# EAGLE board INKTIME_PCB (EAGLE 9.7.0)
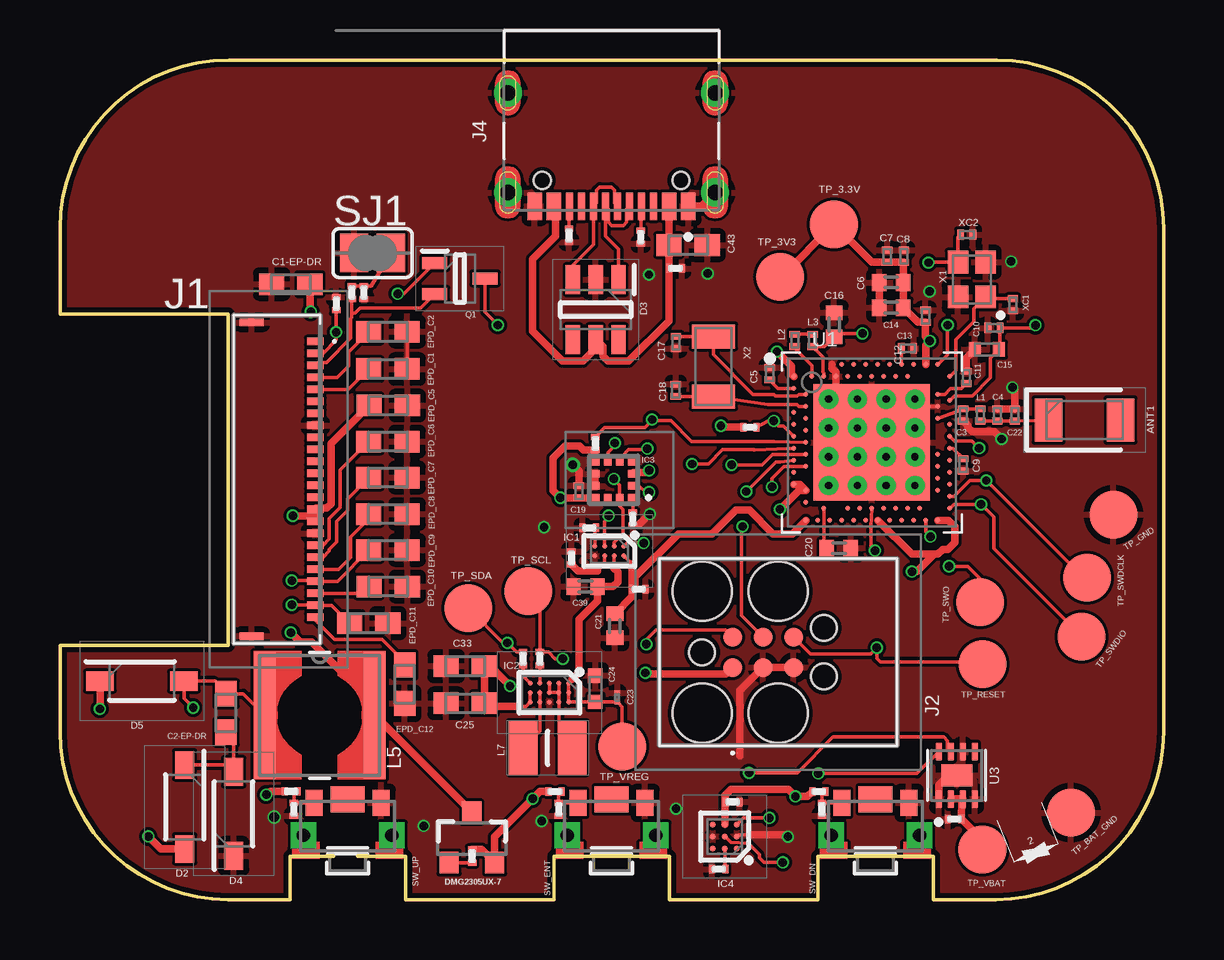
[diagram p0: board, top side]
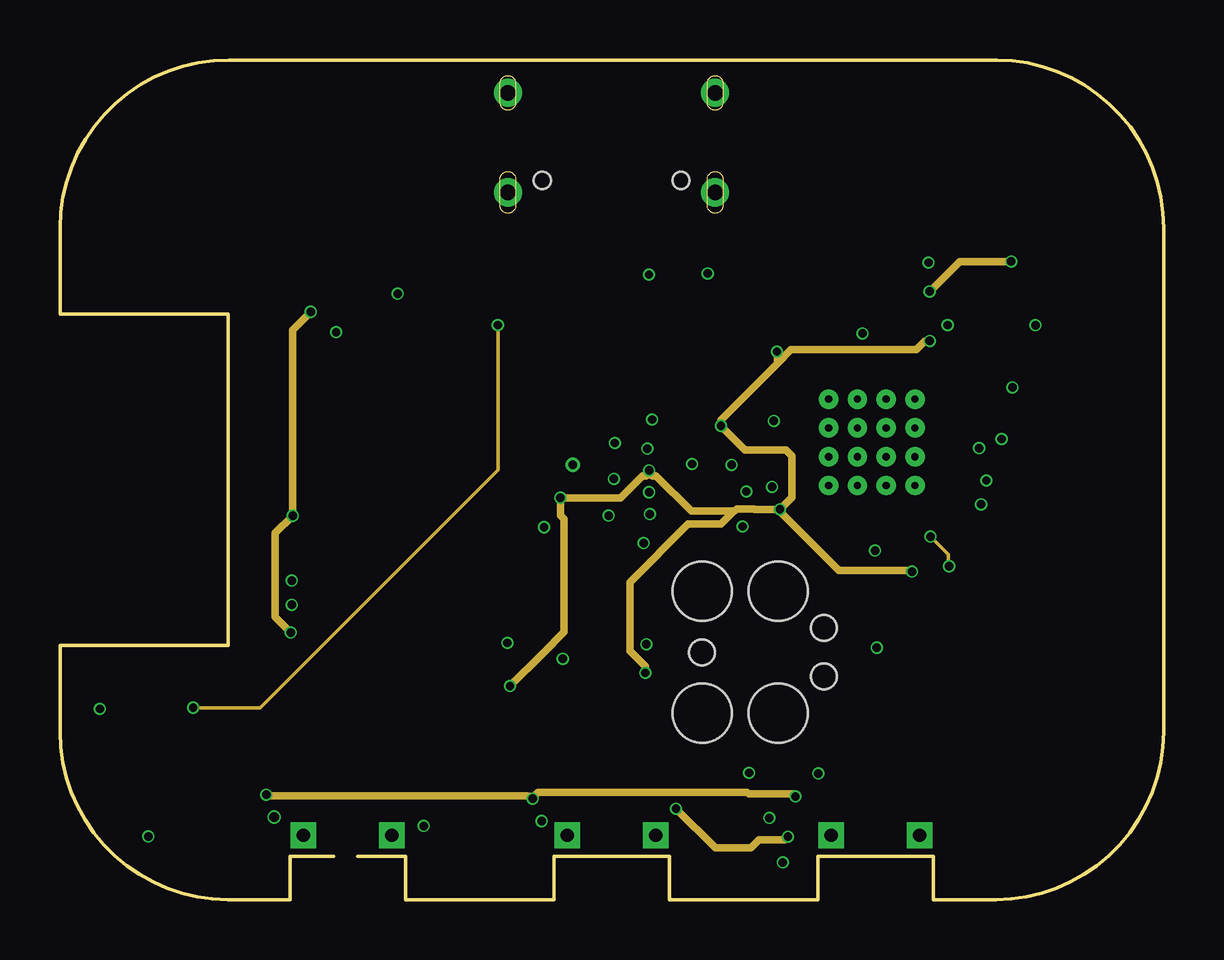
[diagram p1: board, inner layer Route2]
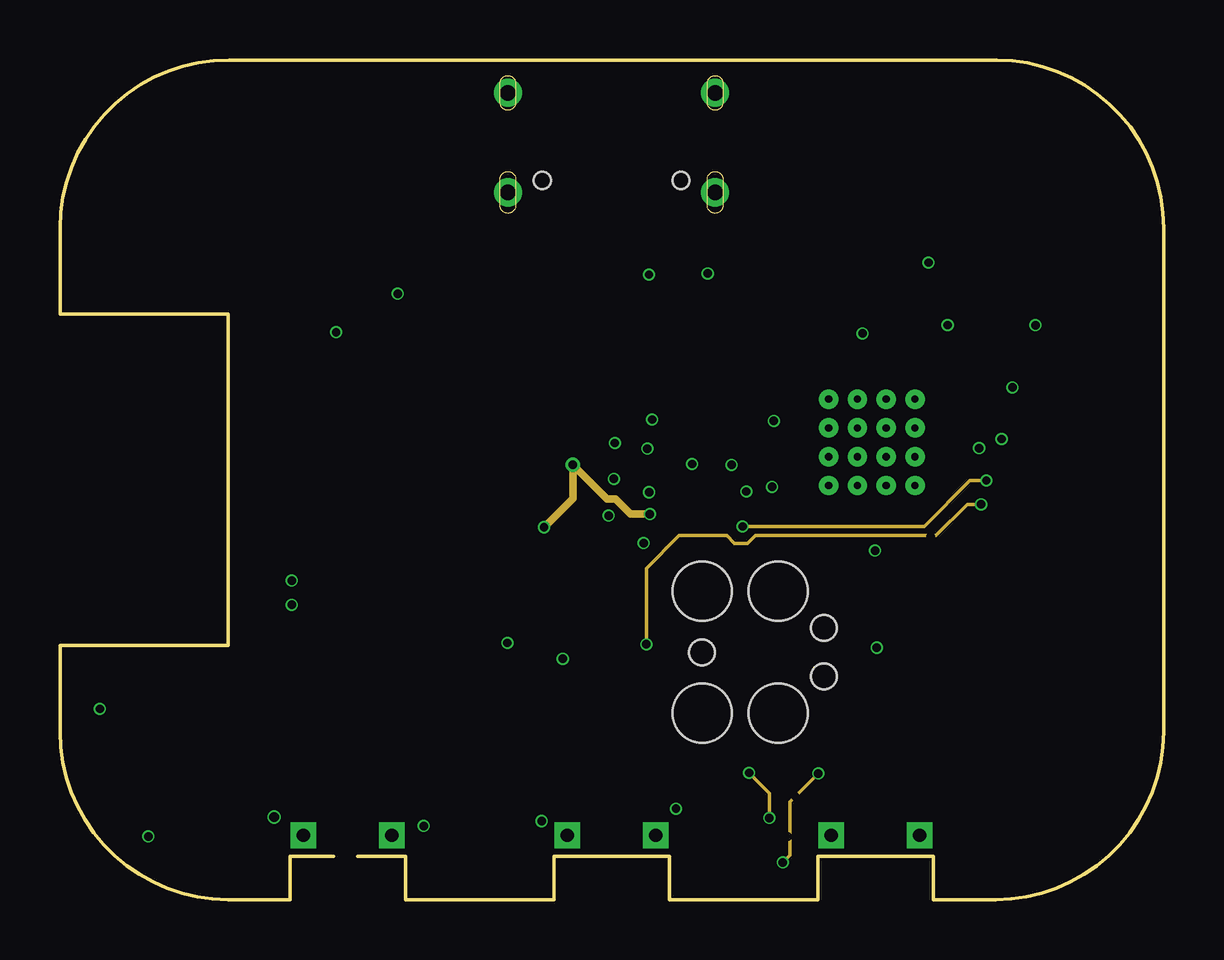
[diagram p2: board, inner layer Route15]
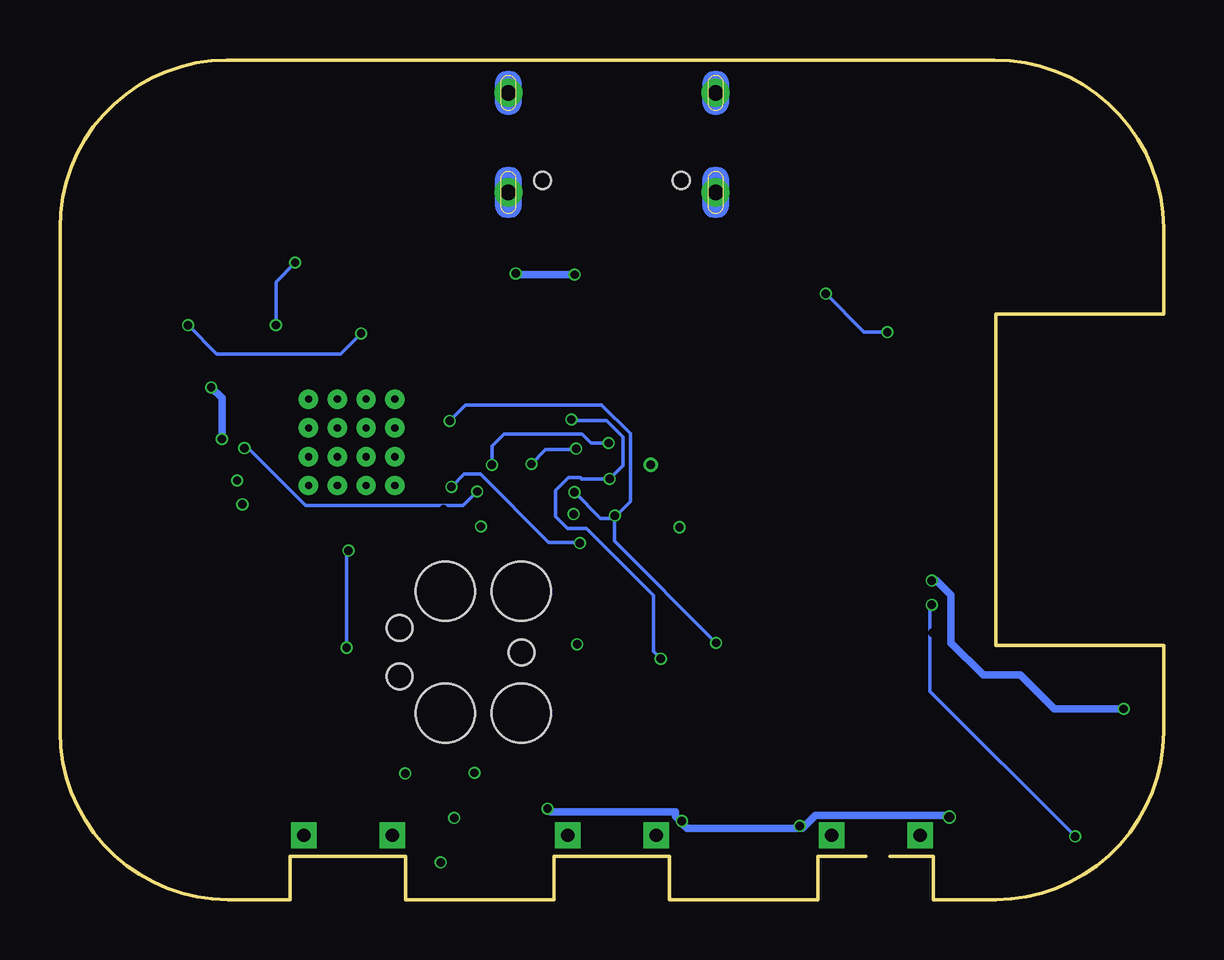
[diagram p3: board, bottom side, seen from below]

Size 46 x 35 mm. Coordinates in mm from the lower left corner, seen from the top.
Outline: 39,0 36.4,0 36.4,1.8 31.6,1.8 31.6,0 25.4,0 25.4,1.8 20.6,1.8 20.6,0 14.4,0 14.4,1.8 9.6,1.8 9.6,0 7,0 arc-90 0,7 0,10.6 7,10.6 7,24.4 0,24.4 0,28 arc-90 7.05,35 39.05,35 arc-90 46,28 46,7 arc-90 39,0
Copper layers (1*16): Top 0.035mm / dielectric 1.6mm / Bottom 0.035mm
Design rules "jlcpcb-2layers": minimum track width 5mil, minimum drill 0.3mm, track to track 5mil, track to pad 5mil, pad to pad 5mil, via to via 5mil, smd to smd 5mil, copper to edge 0.2mm, drill to drill 6mil, minimum pad ring 10mil, minimum via ring 3mil, stop-mask expansion 4mil, vias tented up to drill 0mil, thermal gap 10mil

## Footprints (pad centres in the part's own frame; a part is rotated, then mirrored left to right if it is on the bottom)
2450AT18B100E_ANTC3216X140N = smd 1.15 x 1.8: 1 -1.5,0; 2 1.5,0
NORDIC_NRF_3_RESC0603_N = smd 1.05 x 0.9: 1 -0.8,0; 2 0.8,0
NORDIC_NRF_3_RESC0201_L = smd 0.28 x 0.43: 1 -0.255,0; 2 0.255,0
PERFECT_0402_0402 = smd 0.6 x 0.7: 1 -0.5,0; 2 0.5,0
NORDIC_NRF_3_RESC0402_L = smd 0.5 x 0.6: 1 -0.5,0; 2 0.5,0
GRM011R60J152KE01L_2_CAPC0201X13N = smd 0.22 x 0.23: 1 -0.185,0; 2 0.185,0
NORDIC_NRF_3_RESC0402_N = smd 0.6 x 0.6: 1 -0.55,0; 2 0.55,0
GRM011R60J152KE01L_1_0201 = smd 0.35 x 0.25: 1 0,0.275; 2 0,-0.275
ESP32_C6_LIBRARY_5_SOD3716X135N = smd 1.15 x 0.8: 1 -1.75,0; 2 1.75,0
ESP32_C6_LIBRARY_3_SOT95P280X145-6N = smd 1.2 x 0.6: 1 -1.25,0.95; 2 -1.25,0; 3 -1.25,-0.95; 4 1.25,-0.95; 5 1.25,0; 6 1.25,0.95
ESP32_C6_LIBRARY_4_ESP32_C6_LIBRARY_4_ESP32_C6_LIBRARY_4_ESP32_C6_LIBRARY_4_ESP32_WROVER_SPARKFUN-DISCRETESEMI_SOT23-3 = smd 0.8 x 0.9: 1 -0.95,-1; 2 0.95,-1; 3 0,1.1
BQ25180YBGR_BGA8C40P2X4_100X155X50 = smd 0.2 x 0.2: A1 -0.2,0.6; A2 0.2,0.6; B1 -0.2,0.2; B2 0.2,0.2; C1 -0.2,-0.2; C2 0.2,-0.2; D1 -0.2,-0.6; D2 0.2,-0.6
RT6160AWSC_BGA15C40P3X5_140X230X60 = smd 0.216 x 0.216: A1 -0.4,0.8; A2 0,0.8; A3 0.4,0.8; B1 -0.4,0.4; B2 0,0.4; B3 0.4,0.4; C1 -0.4,0; C2 0,0; C3 0.4,0; D1 -0.4,-0.4; D2 0,-0.4; D3 0.4,-0.4; E1 -0.4,-0.8; E2 0,-0.8; E3 0.4,-0.8
BMA423_BMA423 = smd 0.3 x 0.35: 1 -0.75,-0.775; 2 -0.25,-0.775; 3 0.25,-0.775; 4 0.75,-0.775; 7 0.75,0.775; 8 0.25,0.775; 9 -0.25,0.775; 10 -0.75,0.775 | smd 0.35 x 0.3: 5 0.775,-0.25; 6 0.775,0.25; 11 -0.775,0.25; 12 -0.775,-0.25
DRV2605YZFR_BGA9C50P3X3_144X144X62 = smd 0.25 x 0.25: A1 -0.5,0.5; A2 0,0.5; A3 0.5,0.5; B1 -0.5,0; B2 0,0; B3 0.5,0; C1 -0.5,-0.5; C2 0,-0.5; C3 0.5,-0.5
503480-2400_5034802400 = smd 0.3 x 0.7: 1 -5.75,1.525; 2 -5.25,1.525; 3 -4.75,1.525; 4 -4.25,1.525; 5 -3.75,1.525; 6 -3.25,1.525; 7 -2.75,1.525; 8 -2.25,1.525; 9 -1.75,1.525; 10 -1.25,1.525; 11 -0.75,1.525; 12 -0.25,1.525; 13 0.25,1.525; 14 0.75,1.525; 15 1.25,1.525; 16 1.75,1.525; 17 2.25,1.525; 18 2.75,1.525; 19 3.25,1.525; 20 3.75,1.525; 21 4.25,1.525; 22 4.75,1.525; 23 5.25,1.525; 24 5.75,1.525 | smd 0.3 x 1: MP1 -6.54,-1.125; MP2 6.54,-1.125
TC2030-IDC_TC2030IDC = smd 0.783 x 0.783: 1 -0.953,-0.635; 2 -0.953,0.635; 3 0.317,-0.635; 4 0.317,0.635; 5 1.588,-0.635; 6 1.588,0.635 | hole 2.451: -2.223,-2.54; -2.223,2.54; 0.952,-2.54; 0.952,2.54 | hole 1.067: -2.223,0; 2.857,-1.016; 2.857,1.016
KH-TYPE-C-16P_KINGHELM_KH-TYPE-C-16P = smd 0.6 x 1.15: A1_B12 -3.2,4.725; A4_B9 -2.4,4.725; A9_B4 2.4,4.725; A12_B1 3.2,4.725 | smd 0.3 x 1.15: A5 -1.25,4.725; A6 -0.25,4.725; A7 0.25,4.725; A8 1.25,4.725; B5 1.75,4.725; B6 0.75,4.725; B7 -0.75,4.725; B8 -1.75,4.725 | drill 0.65 pad 1.05: SH1 -4.32,0; SH2 4.32,0; SH3 -4.32,4.15; SH4 4.32,4.15 | hole 0.7: -2.89,3.65; 2.89,3.65
NORDIC_NRF_2_RESC0201_L = smd 0.28 x 0.43: 1 -0.255,0; 2 0.255,0
ESP32_C6_LIBRARY_2_IND_4828-WE-TPC_WRE = smd 0.9 x 5.3: 1 -2.286,0; 2 2.286,0
MLP2016SR47MT0S1_INDC2016X100N = smd 1.2 x 2.2: 1 -1.028,0; 2 1.028,0
ESP32_C6_LIBRARY_6_SOT65P210X110-3N = smd 1.05 x 0.5: 1 -1.05,0.65; 2 -1.05,-0.65; 3 1.05,0
CPF0201D7K68C1_0201 = smd 0.35 x 0.25: 1 0,0.275; 2 0,-0.275
ESP32_C6_LIBRARY_7_JUMPER_SJ = smd 1.168 x 1.6: 1 -0.762,0; 2 0.762,0
2025-10-22_07-23-44_LIBRARY_SW_EVP-AKE31A_PAN = smd 0.711 x 1.092: 1 -1.4,-0.972; 2 1.4,-0.972 | drill 0.559 pad 0.914 square: 3 -1.848,0.381; 4 1.848,0.381 | smd 1.397 x 1.092: 5 0,-1.124
HECTOR_WATCH_1_TP20R = smd 2 x 2: TP 0,0
NORDIC_NRF_4_AQFN50P700X700X85_HS-74N = smd 4.85 x 4.85: P$74 0,0 | drill 0.3 pad 0.6: P$75 -1.8,1.8; P$76 -0.6,1.8; P$77 0.6,1.8; P$78 1.8,1.8; P$79 -1.8,0.6; P$80 -0.6,0.6; P$81 0.6,0.6; P$82 1.8,0.6; P$83 -1.8,-0.6; P$84 -0.6,-0.6; P$85 0.6,-0.6; P$86 1.8,-0.6; P$87 -1.8,-1.8; P$88 -0.6,-1.8; P$89 0.6,-1.8; P$90 1.8,-1.8 | smd 0.2 x 0.2: P$A8 -1.25,3.25; P$A10 -0.75,3.25; P$A12 -0.25,3.25; P$A14 0.25,3.25; P$A16 0.75,3.25; P$A18 1.25,3.25; P$A20 1.75,3.25; P$A22 2.25,3.25; P$A23 2.75,3.25; P$AA24 3.25,-2.25; P$AB2 -2.75,-2.5; P$AC5 -2,-2.75; P$AC9 -1,-2.75; P$AC11 -0.5,-2.75; P$AC13 0,-2.75; P$AC15 0.5,-2.75; P$AC17 1,-2.75; P$AC19 1.5,-2.75; P$AC21 2,-2.75; P$AC24 3.25,-2.75; P$AD2 -2.75,-3.25; P$AD4 -2.25,-3.25; P$AD6 -1.75,-3.25; P$AD8 -1.25,-3.25; P$AD10 -0.75,-3.25; P$AD12 -0.25,-3.25; P$AD14 0.25,-3.25; P$AD16 0.75,-3.25; P$AD18 1.25,-3.25; P$AD20 1.75,-3.25; P$AD22 2.25,-3.25; P$AD23 2.75,-3.25; P$B1 -3.25,2.75; P$B3 -2.5,2.75; P$B5 -2,2.75; P$B7 -1.5,2.75; P$B9 -1,2.75; P$B11 -0.5,2.75; P$B13 0,2.75; P$B15 0.5,2.75; P$B17 1,2.75; P$B19 1.5,2.75; P$B24 3.25,2.75; P$C1 -3.25,2.25; P$D2 -2.75,2; P$D23 2.75,2; P$E24 3.25,1.75; P$F2 -2.75,1.5; P$F23 2.75,1.5; P$G1 -3.25,1.25; P$H2 -2.75,1; P$H23 2.75,1; P$J1 -3.25,0.75; P$J24 3.25,0.75; P$K2 -2.75,0.5; P$L1 -3.25,0.25; P$L24 3.25,0.25; P$M2 -2.75,0; P$N1 -3.25,-0.25; P$N24 3.25,-0.25; P$P2 -2.75,-0.5; P$P23 2.75,-0.5; P$R1 -3.25,-0.75; P$R24 3.25,-0.75; P$T2 -2.75,-1; P$T23 2.75,-1; P$U1 -3.25,-1.25; P$U24 3.25,-1.25; P$V23 2.75,-1.5; P$W1 -3.25,-1.75; P$W24 3.25,-1.75; P$Y2 -2.75,-2; P$Y23 2.75,-2
ESP32_C6_LIBRARY_SON50P200X200X80-9N = smd 0.76 x 0.27: 1 -0.985,0.75; 2 -0.985,0.25; 3 -0.985,-0.25; 4 -0.985,-0.75; 5 0.985,-0.75; 6 0.985,-0.25; 7 0.985,0.25; 8 0.985,0.75 | smd 0.9 x 1.3: 9 0,0
NORDIC_NRF_BT-XTAL_2016_N = smd 0.95 x 0.85: 1 -0.725,-0.575; 2 0.725,-0.575; 3 0.725,0.575; 4 -0.725,0.575
NORDIC_NRF_1_XTAL_3215_N = smd 1 x 1.8: 1 -1.25,0; 2 1.25,0

## Placement (x,y rotation side)
ANT1  2450AT18B100E  [2450AT18B100E_ANTC3216X140N]  42.71,19.99 0 top
C1-EP-DR  10uF  [NORDIC_NRF_3_RESC0603_N]  9.62,25.65 0 top
C2-EP-DR  4.7uF/25V  [NORDIC_NRF_3_RESC0603_N]  6.92,7.78 270 top
C3  1pF  [NORDIC_NRF_3_RESC0201_L]  37.65,20.2 270 top
C4  1pF  [NORDIC_NRF_3_RESC0201_L]  39.08,20.2 90 top
C5  100nF  [NORDIC_NRF_3_RESC0201_L]  29.58,21.92 90 top
C6  4.7uF  [PERFECT_0402_0402]  34.65,25.72 180 top
C7  100nF  [NORDIC_NRF_3_RESC0201_L]  34.48,26.82 90 top
C8  100nF  [NORDIC_NRF_3_RESC0201_L]  35.18,26.82 90 top
C9  820pF  [NORDIC_NRF_3_RESC0201_L]  37.65,18.12 270 top
C10  N.C.  [NORDIC_NRF_3_RESC0201_L]  38.93,23.83 180 top
C11  100pF  [NORDIC_NRF_3_RESC0201_L]  37.78,21.77 90 top
C12  100nF  [NORDIC_NRF_3_RESC0201_L]  36.08,24.32 90 top
C13  N.C.  [NORDIC_NRF_3_RESC0201_L]  35.33,22.98 0 top
C14  4.7uF  [PERFECT_0402_0402]  34.65,24.67 180 top
C15  1uF  [NORDIC_NRF_3_RESC0402_L]  38.64,22.93 180 top
C16  47nF  [PERFECT_0402_0402]  32.27,23.96 90 top
C17  12pF  [NORDIC_NRF_3_RESC0201_L]  25.68,23.22 90 top
C18  12pF  [NORDIC_NRF_3_RESC0201_L]  25.67,21.23 270 top
C19  100nF  [NORDIC_NRF_3_RESC0201_L]  21.63,17 90 top
C20  4.7uF  [PERFECT_0402_0402]  32.47,14.65 0 top
C21  4.7uF  [PERFECT_0402_0402]  23.13,11.41 270 top
C22  N.C.  [NORDIC_NRF_3_RESC0201_L]  39.8,20.2 90 top
C23  0.1uF  [GRM011R60J152KE01L_2_CAPC0201X13N]  23.23,8.43 270 top
C24  10uF  [NORDIC_NRF_3_RESC0402_N]  22.32,8.79 270 top
C25  22uF  [NORDIC_NRF_3_RESC0603_N]  16.89,8.18 180 top
C27  0.1uF  [GRM011R60J152KE01L_1_0201]  37.29,3.36 90 top
C29  1uF  [GRM011R60J152KE01L_1_0201]  31.76,3.76 180 top
C30  1uF  [GRM011R60J152KE01L_1_0201]  9.75,3.76 180 top
C31  1uF  [GRM011R60J152KE01L_1_0201]  20.79,3.76 180 top
C32  1uF  [GRM011R60J152KE01L_1_0201]  27.46,1.27 90 top
C33  22uF  [NORDIC_NRF_3_RESC0603_N]  16.89,9.73 180 top
C34  0.1uF  [GRM011R60J152KE01L_1_0201]  28.04,4.07 270 top
C37  1uF  [GRM011R60J152KE01L_1_0201]  21.32,14.24 0 top
C38  1uF  [GRM011R60J152KE01L_1_0201]  24.13,12.93 270 top
C39  10uF  [PERFECT_0402_0402]  21.91,13.04 180 top
C42  1uF  [GRM011R60J152KE01L_1_0201]  25.66,26.31 90 top
C43  4.7uF  [NORDIC_NRF_3_RESC0603_N]  26.18,27.28 0 top
D2  MBR0530  [ESP32_C6_LIBRARY_5_SOD3716X135N]  5.2,3.86 270 top
D3  USBLC6-2SC6Y  [ESP32_C6_LIBRARY_3_SOT95P280X145-6N]  22.33,24.59 270 top
D4  MBR0530  [ESP32_C6_LIBRARY_5_SOD3716X135N]  7.24,3.57 90 top
D5  MBR0530  [ESP32_C6_LIBRARY_5_SOD3716X135N]  3.42,9.11 0 top
DMG2305UX-7  20V/4.2A/52mΩ/1.4W  [ESP32_C6_LIBRARY_4_ESP32_C6_LIBRARY_4_ESP32_C6_LIBRARY_4_ESP32_C6_LIBRARY_4_ESP32_WROVER_SPARKFUN-DISCRETESEMI_SOT23-3]  17.17,2.54 0 top
EPD_C1  1uF/50V  [NORDIC_NRF_3_RESC0603_N]  13.67,22.12 180 top
EPD_C2  1uF/50V  [NORDIC_NRF_3_RESC0603_N]  13.67,23.67 180 top
EPD_C5  0.1uF/50V  [NORDIC_NRF_3_RESC0603_N]  13.68,20.6 180 top
EPD_C6  1uF/50V  [NORDIC_NRF_3_RESC0603_N]  13.67,19.09 180 top
EPD_C7  1uF/50V  [NORDIC_NRF_3_RESC0603_N]  13.67,17.59 180 top
EPD_C8  1uF/50V  [NORDIC_NRF_3_RESC0603_N]  13.67,16.07 180 top
EPD_C9  1uF/50V  [NORDIC_NRF_3_RESC0603_N]  13.67,14.57 180 top
EPD_C10  1uF/50V  [NORDIC_NRF_3_RESC0603_N]  13.68,13.05 180 top
EPD_C11  1uF/50V  [NORDIC_NRF_3_RESC0603_N]  12.87,11.52 180 top
EPD_C12  1uF/50V  [NORDIC_NRF_3_RESC0603_N]  14.37,8.98 90 top
IC1  BQ25180YBGR  [BQ25180YBGR_BGA8C40P2X4_100X155X50]  22.9,14.53 270 top
IC2  RT6160AWSC  [RT6160AWSC_BGA15C40P3X5_140X230X60]  20.4,8.63 270 top
IC3  BMA423  [BMA423_BMA423]  23.08,17.5 90 top
IC4  DRV2605YZFR  [DRV2605YZFR_BGA9C50P3X3_144X144X62]  27.71,2.63 180 top
J1  503480-2400  [503480-2400_5034802400]  9.12,17.52 270 top
J2  TC2030-IDC  [TC2030-IDC_TC2030IDC]  28.99,10.31 0 top
J4  KH-TYPE-C-16P  [KH-TYPE-C-16P_KINGHELM_KH-TYPE-C-16P]  22.99,33.63 180 top
L1  3.9nH  [NORDIC_NRF_2_RESC0201_L]  38.36,20.2 270 top
L2  10uH  [NORDIC_NRF_2_RESC0201_L]  30.63,23.31 90 top
L3  15nH  [NORDIC_NRF_2_RESC0201_L]  31.37,23.31 270 top
L5  68uH  [ESP32_C6_LIBRARY_2_IND_4828-WE-TPC_WRE]  10.83,7.68 0 top
L7  FTC252012SR47MBCA  [MLP2016SR47MT0S1_INDC2016X100N]  20.33,6.33 180 top
Q1  SI1308EDL-T1-GE3  [ESP32_C6_LIBRARY_6_SOT65P210X110-3N]  16.67,25.89 0 top
R1  0  [CPF0201D7K68C1_0201]  23.88,15.86 180 top
R1_EP_DR  0.47  [CPF0201D7K68C1_0201]  12.17,25.3 0 top
R1_USB  5K1  [CPF0201D7K68C1_0201]  24.21,27.61 180 top
R2  0  [CPF0201D7K68C1_0201]  19.3,10.04 0 top
R2_EP_DR  10K  [CPF0201D7K68C1_0201]  11.52,24.84 0 top
R2_USB  5K1  [CPF0201D7K68C1_0201]  21.22,27.69 0 top
R4  0  [CPF0201D7K68C1_0201]  20,10.04 0 top
R5  10K  [CPF0201D7K68C1_0201]  9.64,4.51 270 top
R7  10K  [CPF0201D7K68C1_0201]  31.64,4.5 270 top
R8  10K  [CPF0201D7K68C1_0201]  20.64,4.5 270 top
R9  10K  [CPF0201D7K68C1_0201]  22.06,15.49 90 top
R17  3K3  [CPF0201D7K68C1_0201]  22.32,19.01 180 top
R18  3K3  [CPF0201D7K68C1_0201]  28.76,19.69 90 top
R_PWR_EPD  10K  [CPF0201D7K68C1_0201]  17.18,1.81 180 top
R_TYPE_SEL  2.2  [CPF0201D7K68C1_0201]  12.67,25.3 180 top
SJ1  [ESP32_C6_LIBRARY_7_JUMPER_SJ]  13.03,26.95 0 top
SW_DN  2025-10-22_07-23-44_LIBRARY_EVP-AKE31ASW_EVP-AKE31A_PAN  [2025-10-22_07-23-44_LIBRARY_SW_EVP-AKE31A_PAN]  33.99,3.06 180 top
SW_ENT  2025-10-22_07-23-44_LIBRARY_EVP-AKE31ASW_EVP-AKE31A_PAN  [2025-10-22_07-23-44_LIBRARY_SW_EVP-AKE31A_PAN]  22.99,3.06 180 top
SW_UP  2025-10-22_07-23-44_LIBRARY_EVP-AKE31ASW_EVP-AKE31A_PAN  [2025-10-22_07-23-44_LIBRARY_SW_EVP-AKE31A_PAN]  11.99,3.06 180 top
TP_3.3V  HECTOR_WATCH_1_TPTP20R  [HECTOR_WATCH_1_TP20R]  32.26,28.15 0 top
TP_3V3  HECTOR_WATCH_1_TPTP20R  [HECTOR_WATCH_1_TP20R]  30.02,25.96 0 top
TP_BAT_GND  HECTOR_WATCH_1_TPTP20R  [HECTOR_WATCH_1_TP20R]  42.14,3.62 90 top
TP_GND  HECTOR_WATCH_1_TPTP20R  [HECTOR_WATCH_1_TP20R]  43.91,16.05 0 top
TP_RESET  HECTOR_WATCH_1_TPTP20R  [HECTOR_WATCH_1_TP20R]  38.45,9.82 0 top
TP_SCL  HECTOR_WATCH_1_TPTP20R  [HECTOR_WATCH_1_TP20R]  19.53,12.85 0 top
TP_SDA  HECTOR_WATCH_1_TPTP20R  [HECTOR_WATCH_1_TP20R]  17.02,12.15 0 top
TP_SWDCLK  HECTOR_WATCH_1_TPTP20R  [HECTOR_WATCH_1_TP20R]  42.81,13.41 0 top
TP_SWDIO  HECTOR_WATCH_1_TPTP20R  [HECTOR_WATCH_1_TP20R]  42.59,10.97 0 top
TP_SWO  HECTOR_WATCH_1_TPTP20R  [HECTOR_WATCH_1_TP20R]  38.36,12.4 0 top
TP_VBAT  HECTOR_WATCH_1_TPTP20R  [HECTOR_WATCH_1_TP20R]  38.45,2.09 180 top
TP_VREG  HECTOR_WATCH_1_TPTP20R  [HECTOR_WATCH_1_TP20R]  23.44,6.37 0 top
U1  NRF52840_QF  [NORDIC_NRF_4_AQFN50P700X700X85_HS-74N]  33.84,19.06 0 top
U3  MAX17048G+T10  [ESP32_C6_LIBRARY_SON50P200X200X80-9N]  37.38,5.18 90 top
X1  32MHz  [NORDIC_NRF_BT-XTAL_2016_N]  38.01,25.85 90 top
X2  32.768kHz  [NORDIC_NRF_1_XTAL_3215_N]  27.24,22.22 270 top
XC1  12pF  [NORDIC_NRF_3_RESC0201_L]  39.72,24.8 270 top
XC2  12pF  [NORDIC_NRF_3_RESC0201_L]  37.8,27.72 0 top

## Library data of the parts
ANT1 = InkTime_v5v3; ARROW_PART_NUMBER: 2450AT18B100E; ARROW_PRICE-STOCK: https://www.arrow.com/en/products/2450at18b100e/johanson-dielectrics?utm_currency=USD&region=nac; DESCRIPTION: Antennas 2.45GHz ANTENNA; HEIGHT: 1.4mm; MANUFACTURER_NAME: JOHANSON TECHNOLOGY; MANUFACTURER_PART_NUMBER: 2450AT18B100E; MOUSER_PART_NUMBER: 609-2450AT18B100E; MOUSER_PRICE-STOCK: https://www.mouser.co.uk/ProductDetail/Johanson-Technology/2450AT18B100E?qs=yCnrNFeXz%252Bh5MFsFIXGZGA%3D%3D
C1-EP-DR C2-EP-DR C3-C22 C24 C25 C27 C29-C34 C37-C39 C42 C43 EPD_C1 EPD_C2 EPD_C5-EPD_C12 L1-L3 R1 R1_EP_DR R1_USB R2 R2_EP_DR R2_USB R4 R5 R7-R9 R17 R18 R_PWR_EPD R_TYPE_SEL SJ1 TP_3.3V TP_3V3 TP_BAT_GND TP_GND TP_RESET TP_SCL TP_SDA TP_SWDCLK TP_SWDIO TP_SWO TP_VBAT TP_VREG U1 X1 X2 XC1 XC2 = InkTime_v5v3
C23 = InkTime_v5v3; AVAILABILITY: In Stock; CHECK_PRICES: https://www.snapeda.com/parts/GRM011R60J152KE01L/Murata/view-part/?ref=eda; DESCRIPTION: SMD Capacitor X5R(EIA) with Capacitance: 1500pF Tol. 10%. Rated Voltage: 6.3Vdc; MF: Murata; MP: GRM011R60J152KE01L; PACKAGE: 0201 Murata; PRICE: None; SNAPEDA_LINK: https://www.snapeda.com/parts/GRM011R60J152KE01L/Murata/view-part/?ref=snap
D2 D4 D5 = InkTime_v5v3; AVAILABILITY: In Stock; CHECK_PRICES: https://www.snapeda.com/parts/MBR0530/Onsemi/view-part/?ref=eda; DESCRIPTION: Diode Schottky 30 V 500mA Surface Mount SOD-123; MF: ON Semiconductor; MP: MBR0530; PACKAGE: SOD-123-2 ON Semiconductor; PRICE: None; PURCHASE-URL: https://www.snapeda.com/api/url_track_click_mouser/?unipart_id=179458&manufacturer=ON Semiconductor&part_name=MBR0530&search_term=None; SNAPEDA_LINK: https://www.snapeda.com/parts/MBR0530/Onsemi/view-part/?ref=snap
D3 = InkTime_v5v3; AVAILABILITY: In Stock; CHECK_PRICES: https://www.snapeda.com/parts/USBLC6-2SC6Y/STMicroelectronics/view-part/?ref=eda; DESCRIPTION: 17V Clamp 5A (8/20µs) Ipp Tvs Diode Surface Mount SOT-23-6; MF: STMicroelectronics; MP: USBLC6-2SC6Y; PACKAGE: SOT-23-6 STMicroelectronics; PRICE: None; SNAPEDA_LINK: https://www.snapeda.com/parts/USBLC6-2SC6Y/STMicroelectronics/view-part/?ref=snap
DMG2305UX-7 = InkTime_v5v3; PROD_ID: TRAN-14388
IC1 = InkTime_v5v3; ARROW_PART_NUMBER: BQ25180YBGR; ARROW_PRICE-STOCK: https://www.arrow.com/en/products/bq25180ybgr/texas-instruments?utm_currency=USD&region=nac; DESCRIPTION: Charger IC Lithium Ion/Polymer, Lithium Iron Phosphate 8-DSBGA (1.6x1.1); HEIGHT: 0.5mm; MANUFACTURER_NAME: Texas Instruments; MANUFACTURER_PART_NUMBER: BQ25180YBGR; MOUSER_PART_NUMBER: 595-BQ25180YBGR; MOUSER_PRICE-STOCK: https://www.mouser.co.uk/ProductDetail/Texas-Instruments/BQ25180YBGR?qs=doiCPypUmgEWjAK%252BJAX6Tw%3D%3D
IC2 = InkTime_v5v3; DESCRIPTION: Buck-Boost Regulator Positive Output Step-Up/Step-Down I2C DC-DC Controller IC 15-WL-CSP (BSC) (1.4x2.3); HEIGHT: 0.6mm; MANUFACTURER_NAME: RICHTEK; MANUFACTURER_PART_NUMBER: RT6160AWSC; MOUSER_PART_NUMBER: 835-RT6160AWSC; MOUSER_PRICE-STOCK: https://www.mouser.co.uk/ProductDetail/Richtek/RT6160AWSC?qs=amGC7iS6iy%2FLd9PSoixZXQ%3D%3D
IC3 = InkTime_v5v3; ARROW_PART_NUMBER: BMA423; ARROW_PRICE-STOCK: https://www.arrow.com/en/products/bma423/bosch; DESCRIPTION: Accelerometers Triaxial low-g 12bit Acceleration Sensor; HEIGHT: 1mm; MANUFACTURER_NAME: BOSCH; MANUFACTURER_PART_NUMBER: BMA423; MOUSER_PART_NUMBER: 262-BMA423; MOUSER_PRICE-STOCK: https://www.mouser.co.uk/ProductDetail/Bosch-Sensortec/BMA423?qs=HXFqYaX1Q2xC%252BSgeGoX3mg%3D%3D
IC4 = InkTime_v5v3; ARROW_PART_NUMBER: DRV2605YZFR; ARROW_PRICE-STOCK: https://www.arrow.com/en/products/drv2605yzfr/texas-instruments?region=nac; DESCRIPTION: Haptic Driver for ERM/LRA with Built-In Library and Smart Loop Architecture; HEIGHT: 0.625mm; MANUFACTURER_NAME: Texas Instruments; MANUFACTURER_PART_NUMBER: DRV2605YZFR
J1 = InkTime_v5v3; DESCRIPTION: FFC & FPC Connectors 0.5mm FPC RA SMT Dual Contact 24Ckt; HEIGHT: 1.87mm; MANUFACTURER_NAME: Molex; MANUFACTURER_PART_NUMBER: 503480-2400; MOUSER_PART_NUMBER: 538-503480-2400; MOUSER_PRICE-STOCK: https://www.mouser.co.uk/ProductDetail/Molex/503480-2400?qs=OAhjpuo3Vu7efIoxFh9AOw%3D%3D
J2 = InkTime_v5v3; DESCRIPTION: CABLE ADAPTER 6 POS; HEIGHT: 19mm; MANUFACTURER_NAME: Tag Connect; MANUFACTURER_PART_NUMBER: TC2030-IDC
J4 = InkTime_v5v3; AVAILABILITY: Not in stock; CHECK_PRICES: https://www.snapeda.com/parts/KH-TYPE-C-16P/Kinghelm/view-part/?ref=eda; MF: kinghelm; MP: KH-TYPE-C-16P; PACKAGE: None; PRICE: None; SNAPEDA_LINK: https://www.snapeda.com/parts/KH-TYPE-C-16P/Kinghelm/view-part/?ref=snap
L5 = InkTime_v5v3; COPYRIGHT: Copyright (C) 2024 Ultra Librarian. All rights reserved.; MANUFACTURER_PART_NUMBER: 744043680; MFR_NAME: Wurth Electronics
L7 = InkTime_v5v3; DESCRIPTION: SMD / SMT Inductors (Coils), L=0.47?H, L x W x T :; HEIGHT: 1mm; JLCPCB: https://jlcpcb.com/partdetail/6763488-FTC252012SR47MBCA/C5832368; MANUFACTURER_NAME: TDK; MANUFACTURER_PART_NUMBER: FTC252012SR47MBCA
Q1 = InkTime_v5v3; AVAILABILITY: In Stock; CHECK_PRICES: https://www.snapeda.com/parts/SI1308EDL-T1-GE3/Vishay+Siliconix/view-part/?ref=eda; DESCRIPTION: Si1308EDL-T1-GE3 N-channel MOSFET Transistor, 1.5 A, 30 V, 3-Pin SC-70 | Siliconix / Vishay SI1308EDL-T1-GE3; MF: Vishay Siliconix; MP: SI1308EDL-T1-GE3; PACKAGE: SOT-323 Vishay Semiconductor; PRICE: None; PURCHASE-URL: https://www.snapeda.com/api/url_track_click_mouser/?unipart_id=274603&manufacturer=Vishay Siliconix&part_name=SI1308EDL-T1-GE3&search_term=None; SNAPEDA_LINK: https://www.snapeda.com/parts/SI1308EDL-T1-GE3/Vishay+Siliconix/view-part/?ref=snap
SW_DN SW_ENT SW_UP = InkTime_v5v3; COPYRIGHT: Copyright (C) 2025 Ultra Librarian. All rights reserved.; DIGI-KEY_PART_NUMBER_1: P123437TR-ND; DIGI-KEY_PART_NUMBER_2: P123437CT-ND; DIGI-KEY_PART_NUMBER_3: P123437DKR-ND; MANUFACTURER_NAME: Panasonic; MANUFACTURER_PART_NUMBER: EVP-AKE31A
U3 = InkTime_v5v3; AVAILABILITY: In Stock; CHECK_PRICES: https://www.snapeda.com/parts/MAX17048G+T10/Analog+Devices/view-part/?ref=eda; DESCRIPTION: 3µA 1-Cell/2-Cell Fuel Gauge with ModelGauge; MF: Analog Devices; MP: MAX17048G+T10; PACKAGE: TDFN-8 Maxim; PRICE: None; PURCHASE-URL: https://www.snapeda.com/api/url_track_click_mouser/?unipart_id=329239&manufacturer=Analog Devices&part_name=MAX17048G+T10&search_term=None; SNAPEDA_LINK: https://www.snapeda.com/parts/MAX17048G+T10/Analog+Devices/view-part/?ref=snap

## Nets
3V3/1.7D: C34.2 DMG2305UX-7.2 IC4.C2 R5.2 R7.2 R8.2 R_PWR_EPD.2
3V3/2.4A: C6.1 C7.1 C8.1 C12.1 C14.1 C19.1 C25.1 C33.1 IC2.E2 IC2.E3 IC3.3 IC3.7 IC3.10 J2.1 R17.1 R18.1 TP_3.3V.TP TP_3V3.TP U1.P$A22 U1.P$AD14 U1.P$AD23 U1.P$B1 U1.P$W1 U1.P$Y2
ALERT/1.6C: U3.5
ALERT/2.5C: U1.P$J24
D+/1.5D: D3.4
D+/2.7D: U1.P$AD6
D-/1.5D: D3.6
D-/2.7D: U1.P$AD4
DN: D3.1 J4.A7 J4.B7
DP: D3.3 J4.A6 J4.B6
EPD_3V3: C1-EP-DR.2 DMG2305UX-7.3 EPD_C5.2 J1.15 J1.16 L5.2
EPD_BUSY/1.5D: J1.9
EPD_BUSY/2.2D: U1.P$AD12
EPD_CS/1.4C: J1.12
EPD_CS/2.2D: U1.P$K2
EPD_DC/1.5D: J1.11
EPD_DC/2.2D: U1.P$AD10
EPD_RST/1.5D: J1.10
EPD_RST/2.2D: U1.P$AC11
GDR: J1.2 Q1.1 R2_EP_DR.2
GND: C1-EP-DR.1 C3.2 C4.2 C5.2 C6.2 C7.2 C8.2 C9.2 C10.2 C11.2 C12.2 C13.2 C14.2 C15.2 C16.2 C17.1 C18.1 C19.2 C20.2 C21.2 C22.2 C23.1 C24.1 C25.2 C27.1 C29.1 C30.1 C31.1 C32.1 C33.2 C34.1 C37.1 C38.1 C39.2 C42.2 C43.2 D3.2 D4.1 EPD_C1.1 EPD_C2.1 EPD_C5.1 EPD_C6.1 EPD_C7.1 EPD_C8.1 EPD_C9.1 EPD_C10.1 EPD_C11.1 EPD_C12.1 IC1.D2 IC2.C3 IC3.8 IC3.9 IC4.B1 IC4.B3 J1.8 J1.17 J1.MP1 J1.MP2 J2.3 J2.5 J4.A1_B12 J4.A12_B1 J4.SH1 J4.SH2 J4.SH3 J4.SH4 R1.1 R1_USB.1 R2_EP_DR.1 R2_USB.2 R9.1 R_TYPE_SEL.1 SJ1.1 SW_DN.1 SW_ENT.1 SW_UP.1 TP_BAT_GND.TP TP_GND.TP U1.P$74 U1.P$75 U1.P$76 U1.P$77 U1.P$78 U1.P$79 U1.P$80 U1.P$81 U1.P$82 U1.P$83 U1.P$84 U1.P$85 U1.P$86 U1.P$87 U1.P$88 U1.P$89 U1.P$90 U1.P$B7 U1.P$F23 U3.1 U3.4 U3.6 U3.9 X1.2 X1.4 XC1.2 XC2.2
HAPTIC_EN/1.4C: IC4.A1
HAPTIC_EN/2.6A: U1.P$U1
IMU_INT1: IC3.5 U1.P$N1
IMU_INT2: IC3.6 U1.P$P2
LX1: IC2.B1 IC2.B2 IC2.B3 IC2.C1 IC2.C2 L7.1
LX2: IC2.D2 IC2.D3 L7.2
MOSI/1.5B: J1.14
MOSI/2.2D: U1.P$B13
N$1: IC2.D1 R4.2
N$2: IC1.D1 R9.2
N$3: IC2.E1 R2.2
N$4: U1.P$B24 X1.1 XC1.1
N$5: U1.P$A23 X1.3 XC2.1
N$6: C10.1 C15.1 C16.1 L3.2 U1.P$B5 U1.P$E24
N$7: IC3.1 R1.2
N$8: L2.2 L3.1
N$9: C13.1 U1.P$A18
N$10: L2.1 U1.P$B3
N$12: C32.2 IC4.A2
N$13: C5.1 U1.P$C1
N$14: EPD_C6.2 J1.18
N$15: C9.1 U1.P$N24
N$16: C17.2 U1.P$D2 X2.1
N$17: C18.2 U1.P$F2 X2.2
N$18: C20.1 U1.P$AC5
N$19: C3.1 L1.1 U1.P$H23
N$20: EPD_C12.2 J1.24
N$21: EPD_C2.2 J1.4
N$22: C11.1 U1.P$D23
N$23: J4.B5 R2_USB.1
N$24: J4.A5 R1_USB.2
N$25: EPD_C1.2 J1.5
N$27: EPD_C10.2 J1.22
N$29: EPD_C8.2 J1.20
N$30: EPD_C7.2 J1.19
N$31: R1_EP_DR.1 R_TYPE_SEL.2 SJ1.2
N$33: C2-EP-DR.1 D5.2 L5.1 Q1.3
N$34: C2-EP-DR.2 D2.1 D4.2
OUT+: IC4.A3
OUT-: IC4.C3
P0.04: U1.P$J1
P0.13/1.5D: C30.2 R5.1 SW_UP.2
P0.13/2.6C: U1.P$AD8
P0.14/1.5D: C31.2 R8.1 SW_ENT.2
P0.14/2.7C: U1.P$AC9
P0.19: U1.P$AC15
P0.20: U1.P$AD16
P0.21: U1.P$AC17
P0.22: U1.P$AD18
P0.23: U1.P$AC19
P0.24: U1.P$AD20
P0.25: U1.P$AC21
P0.26: U1.P$G1
P0.27: U1.P$H2
P0.28: U1.P$B11
P0.29: U1.P$A10
P0.30: U1.P$B9
P0.31: U1.P$A8
P1.01/1.6C: DMG2305UX-7.1 R_PWR_EPD.1
P1.01/2.4B: U1.P$Y23
P1.02/1.6D: C29.2 R7.1 SW_DN.2
P1.02/2.8C: U1.P$W24
P1.03: U1.P$V23
P1.04: U1.P$U24
P1.05: U1.P$T23
P1.06: U1.P$R24
P1.07: U1.P$P23
P1.09: U1.P$L24 U1.P$R1
P1.10: U1.P$A20
P1.11: U1.P$B19
P1.12: U1.P$B17
P1.13: U1.P$A16
P1.14: U1.P$B15
P1.15: U1.P$A14
PMIC_INT: IC1.A1 U1.P$T2
PREGVH: D5.1 EPD_C9.2 J1.21
PREVGL: D2.2 EPD_C11.2 J1.23
RESE: J1.3 Q1.2 R1_EP_DR.2
RESET: J2.6 TP_RESET.TP U1.P$AC13
RF: ANT1.1 C4.1 C22.1 L1.2
SCK/1.5B: J1.13
SCK/2.2D: U1.P$A12
SCL/1.4C: IC4.C1 U3.7
SCL/2.4C: IC1.B1 IC3.12 R4.1 R17.2 TP_SCL.TP U1.P$M2
SDA/1.4C: IC4.B2 U3.8
SDA/2.4C: IC1.C1 IC3.2 R2.1 R18.2 TP_SDA.TP U1.P$L1
SWDCLK: J2.4 TP_SWDCLK.TP U1.P$AA24
SWDIO: J2.2 TP_SWDIO.TP U1.P$AC24
SWO: TP_SWO.TP U1.P$AD22
VBAT/1.2A: C27.2 TP_VBAT.TP U3.2 U3.3
VBAT/2.5C: C37.2 IC1.C2
VBUS/1.5D: C42.1 C43.1 D3.5 J4.A4_B9 J4.A9_B4
VBUS/2.6D: C21.1 C38.2 IC1.A2 U1.P$AD2
VREG: C23.2 C24.2 C39.1 IC1.B2 IC2.A1 IC2.A2 IC2.A3 TP_VREG.TP

## Tracks (layer width: path | path; a pad name or v marks a point on that pad's centre or on a via)
3V3/1.7D  (via drill 0.35 layers 1-2)
  Top 0.305: R8.2 20,4.5 v19.7,4.2 18.12,2.62 DMG2305UX-7.2 17.58,2.09 R_PWR_EPD.2 | R5.2 8.78,4.51 8.64,4.37 v8.6,4.37 | IC4.C2 27.71,4.02 | 27.71,4.02 C34.2 | 27.71,4.02 27.71,4.35 27.96,4.6 30.36,4.6 v30.65,4.3 31.16,4.3 R7.2
  Route2 0.305: v8.6,4.37 8.64,4.33 19.47,4.33 19.5,4.3 19.6,4.3 v19.7,4.2 19.7,4.25 19.92,4.47 28.64,4.47 28.71,4.4 30.55,4.4 v30.65,4.3
3V3/2.4A  (via drill 0.35 layers 1-2)
  Top 0.152: IC2.E2 IC2.E3 19.42,8.05 19.1,8.05
  Top 0.305: 19.1,8.05 17.82,8.05 C25.1 C33.1 17.93,9.73 v18.76,8.9 | IC3.3 23.9,17.8 24.55,17.8 24.56,17.8 v24.56,17.89 | IC3.10 C19.1 v20.86,16.75 20.55,17.06 20.55,18.4 21.05,18.9 21.66,18.9 21.83,18.73 R17.1 22.3,18.72 IC3.7 | U1.P$W1 30.84,17.31 U1.P$Y2 30.8,17.06 v30.01,16.27 | J2.1 27.76,9.4 24.45,9.4 v24.4,9.45 | U1.P$AD23 37.04,15.81 37.3,15.55 37.3,14.89 37.01,14.6 36.8,14.6 36.6,14.4 36.45,14.4 | U1.P$AD14 35.5,14.4 36.25,14.4 36.45,14.4 | R18.1 27.61,19.69 v27.55,19.75 | U1.P$B1 30.5,21.9 30.5,22.23 v29.88,22.85 | U1.P$A22 36.09,23.12 v36.26,23.28 36.08,23.46 C12.1 35.76,24.07 C14.1 C6.1 35.15,26.54 C8.1 C7.1 33.84,26.56 TP_3.3V.TP 30.07,25.96 TP_3V3.TP | 36.45,14.4 35.72,13.67 v35.51,13.67
  Route2 0.305: v18.76,8.9 20.12,10.26 20.12,10.27 21.01,11.15 21.01,15.87 20.86,16.02 v20.86,16.75 23.37,16.75 24.28,17.66 24.42,17.66 24.56,17.8 | 28.09,16.19 27.55,15.65 26.18,15.65 23.76,13.23 23.76,10.36 24.4,9.72 v24.4,9.45 | 29.9,22.35 27.55,20 v27.55,19.75 28.55,18.75 30.25,18.75 30.5,18.5 30.5,16.76 v30.01,16.27 | v30.01,16.27 30.01,16.17 32.46,13.72 35.47,13.72 v35.51,13.67 | v30.01,16.27 28.94,16.27 28.92,16.29 28.22,16.29 28.12,16.19 28.09,16.19 | 29.9,22.35 29.9,22.83 v29.88,22.85 | v36.26,23.28 36.05,23.28 35.69,22.92 30.47,22.92 29.9,22.35 | 24.56,17.8 24.7,17.66 24.84,17.66 26.32,16.19 28.09,16.19 | 24.56,17.8 v24.56,17.89
DN
  Top 0.152: J4.B7 23.62,28.78 23.62,28.23 23.48,28.1 23,28.1 22.86,28.23 22.86,28.78 J4.A7 22.74,27.66 23.28,27.12 D3.1
DP
  Top 0.152: J4.A6 23.12,29.02 23.12,29.57 22.98,29.71 22.5,29.71 22.36,29.57 22.36,29.02 J4.B6 22.24,27.3 21.38,26.44 D3.3
EPD_3V3  (via drill 0.35 layers 1-2)
  Top 0.305: v9.7,16 10.41,16 J1.16 J1.15 10.69,16.32 11.12,16.32 11.3,16.49 11.3,19.02 EPD_C5.2 | v10.45,24.5 10.42,24.53 C1-EP-DR.2 | v9.62,11.13 10,10.75 10.5,10.75 13.11,8.13 L5.2 13.13,7.68 DMG2305UX-7.3
  Route2 0.305: v10.45,24.5 9.7,23.75 v9.7,16 8.98,15.28 8.98,11.77 v9.62,11.13
GDR  (via drill 0.35)
  Top 0.152: J1.2 10.96,22.77 11.51,23.31 v11.51,23.65 v11.52,23.66 R2_EP_DR.2 | Q1.1 14.34,25.25 v14.08,25.25
  Bottom 0.152: v14.08,25.25 12.48,23.65 v11.51,23.65
GND  (via drill 0.35, 0.35 layers 1-2, 0.35 pad 0.6, 0.4)
  Top 0.152: EPD_C2.1 EPD_C1.1 | 33.84,17.86 U1.P$88 | U1.P$74 U1.P$84 U1.P$83 | U1.P$74 U1.P$87 | U1.P$74 33.84,17.86 | 33.84,17.86 U1.P$89 | U1.P$85 U1.P$90 | U1.P$85 U1.P$86 | U1.P$74 U1.P$85 | U1.P$74 35.04,19.06 U1.P$82 | U1.P$74 U1.P$78 35.94,20.56 U1.P$F23 | U1.P$74 U1.P$81 U1.P$77 | U1.P$80 U1.P$76 | U1.P$74 U1.P$80 | U1.P$80 U1.P$79 | U1.P$74 U1.P$75 | IC4.B1 28.28,2.7 28.8,2.7
  Top 0.305: U3.1 36.63,4.78 37.03,5.18 U3.9 | J2.5 J2.3 28.35,8.72 28.35,6 | C4.2 C22.2 39.8,21.25 v39.7,21.35 | v39.25,19.2 38.95,19.5 38.02,19.5 37.84,19.68 37.84,19.75 C3.2 | U1.P$75 32.34,21.16 U1.P$B7 32.34,21.99 32.19,22.14 32.19,22.3 | v21.38,18.12 21.63,17.87 C19.2 | R1.1 24.09,15.59 24.58,16.07 v24.59,16.07 | J4.A1_B12 26.73,28.9 J4.SH3 | IC3.9 IC3.8 | C6.2 C14.2 | C15.2 37.78,22.57 C11.2 | 28.8,2.7 30.27,2.7 v30.34,2.62
  Route2 0.305: v25.68,3.79 27.32,2.15 28.8,2.15 29.14,2.49 30.21,2.49 v30.34,2.62 | v36.25,25.35 37.5,26.6 v39.65,26.6
  Route15 0.305: v20.18,15.52 21.38,16.72 v21.38,18.12 22.81,16.69 23.15,16.69 23.77,16.07 v24.59,16.07
  Bottom 0.305: 20.15,3.27 20.35,3.46 20.35,3.66 25.55,3.66 v25.68,3.79 | 15.06,2.97 14.52,3.51 9,3.51 v8.93,3.44 | 15.06,2.97 19.86,2.97 20.15,3.27 | 20.15,3.27 v20.08,3.27 | v15.16,3.07 15.06,2.97 | v39.25,19.2 39.25,20.9 v39.7,21.35 | v24.55,26.05 26.95,26.05 v27,26.1
  pour Top: 20.56,1.86 20.58,1.88 25.42,1.88 25.44,1.86 25.46,1.84 25.48,1.82 25.48,0.08 31.52,0.08 31.52,1.92 31.54,1.94 31.56,1.96 31.58,1.98 36.37,1.98 36.39,1.96 36.41,1.94 36.43,1.92 36.43,0.13 39.4,0.08 40.09,0.11 40.78,0.23 41.44,0.44 42.07,0.74 42.66,1.11 43.32,1.65 43.93,2.24 44.48,2.89 44.96,3.59 45.38,4.33 45.61,4.87 45.79,5.42 45.89,5.99 45.94,6.56 45.92,7.13 45.92,7.13 45.92,7.15 45.92,7.16 45.92,7.16 45.92,28.4 45.89,29.04 45.78,29.68 45.61,30.3 45.37,30.9 45.07,31.47 44.71,32.01 44.29,32.5 43.7,33.06 43.06,33.57 42.37,34.01 41.64,34.38 40.88,34.68 39.89,34.87 39.25,34.92 6.66,34.92 5.61,34.77 5,34.65 4.41,34.47 3.85,34.22 3.31,33.91 2.82,33.54 2.36,33.12 1.51,32.17 0.74,31.14 0.08,30.06 0.08,24.48 7.02,24.48 7.04,24.46 7.06,24.44 7.08,24.42 7.08,10.58 7.06,10.56 7.04,10.54 7.02,10.52 0.08,10.52 0.08,6.22 0.08,6.22 0.08,6.22 0.08,6.22 0.09,6.21 0.1,6.2 0.11,6.2 0.11,6.2 0.11,6.19 0.12,6.18 0.12,6.18 0.12,6.18 0.12,6.16 0.13,6.15 0.13,6.15 0.37,4.87 1.11,3.29 2.5,1.71 4.28,0.62 6.31,0.13 9.52,0.08 9.52,1.72 9.54,1.74 9.56,1.76 9.58,1.78 14.42,1.78 14.44,1.76 14.46,1.74 14.48,1.72 14.48,0.13 20.52,0.08 20.52,1.82 20.54,1.84
IMU_INT1  (via drill 0.35)
  Top 0.152: U1.P$N1 30.36,18.8 28.95,18.75 28.92,18.75 | 28.92,18.75 | 28.92,18.75 27.62,18.75 27.03,18.16 v26.35,18.16 | IC3.5 23.45,18.4 23.45,18.5 23.71,18.75 24.44,18.75 v24.48,18.8
  Bottom 0.152: v26.35,18.16 25.76,18.75 24.53,18.75 v24.48,18.8
IMU_INT2  (via drill 0.35)
  Top 0.152: U1.P$P2 29.69,18.54 29.27,18.12 v28,18.12 | IC3.6 22.85,18.3 22.85,18.64 23.13,18.93 v23.13,19.03
  Bottom 0.152: v28,18.12 28,18.9 27.5,19.4 24.23,19.4 23.86,19.03 v23.13,19.03
LX1
  Top 0.152: IC2.B2 IC2.B3 20.8,6.89 L7.1 | IC2.B2 IC2.C2 IC2.C1 | IC2.B1 IC2.B2
LX2
  Top 0.152: IC2.D2 IC2.D3 20,7.03 L7.2
N$1
  Top 0.152: IC2.D1 R4.2
N$2
  Top 0.152: IC1.D1 22.3,15.46 R9.2
N$3
  Top 0.152: IC2.E1 19.3,9.33 R2.2
N$4
  Top 0.152: U1.P$B24 37.34,22.06 37.34,23.35 38.09,24.1 38.09,24.63 X1.1 38.66,25.05 XC1.1
N$5  (via drill 0.35)
  Top 0.152: XC2.1 37.44,27.61 X1.3 36.23,26.57 v36.2,26.55 | U1.P$A23 36.98,22.7 36.98,23.93 v37,23.95
  Bottom 0.152: v36.2,26.55 37,25.75 v37,23.95
N$6  (via drill 0.35)
  Top 0.152: v33.45,23.6 32.41,23.6 C16.1 31.87,23.05 L3.2 31.8,22.62 31.8,21.98 31.84,21.95 U1.P$B5 | U1.P$E24 37.28,21 38.03,21 38.79,21.76 38.79,22.58 C15.1 39.19,22.98 C10.1 40.55,23.83 v40.66,23.94
  Bottom 0.152: v33.45,23.6 34.3,22.75 39.47,22.75 v40.66,23.94
N$7
  Top 0.152: IC3.1 23.88,16.73 R1.2
N$8
  Top 0.152: L3.1 L2.2
N$9
  Top 0.152: C13.1 35.08,22.32 U1.P$A18
N$10
  Top 0.152: L2.1 30.63,22.97 31.34,22.26 U1.P$B3
N$12
  Top 0.152: IC4.A2 27.71,1.29 C32.2
N$13
  Top 0.152: U1.P$C1 29.94,21.31 C5.1
N$14
  Top 0.152: EPD_C6.2 11.68,17.9 11.68,16.34 11.22,15.88 11.22,15.03 10.96,14.77 J1.18
N$15
  Top 0.152: U1.P$N24 37.21,18.81 C9.1
N$16
  Top 0.152: U1.P$D2 30.8,21.06 30.73,20.98 29.83,20.98 29.75,21.06 28.89,21.06 27.24,22.71 X2.1 C17.2
N$17
  Top 0.152: U1.P$F2 30.8,20.56 30.73,20.64 29.52,20.64 X2.2 C18.2
N$18
  Top 0.152: U1.P$AC5 31.85,15.35 31.85,14.76 C20.1
N$19
  Top 0.152: L1.1 C3.1 U1.P$H23
N$20
  Top 0.152: EPD_C12.2 14.37,9.9 13.43,10.84 11.45,10.84 10.64,11.65 J1.24
N$21
  Top 0.152: J1.4 11.56,21.77 12.03,22.24 12.03,22.83 EPD_C2.2
N$22
  Top 0.152: C11.1 37.57,21.3 37.12,21.3 36.88,21.06 U1.P$D23
N$23
  Top 0.152: R2_USB.1 21.21,28.88 J4.B5
N$24
  Top 0.152: R1_USB.2 J4.A5
N$25
  Top 0.152: EPD_C1.2 12.02,21.27 J1.5
N$27
  Top 0.152: J1.22 12.6,12.77 EPD_C10.2
N$29
  Top 0.152: EPD_C8.2 12.87,15.87 12.12,15.12 12.12,14.27 11.62,13.77 J1.20
N$30
  Top 0.152: EPD_C7.2 11.98,16.7 11.98,16.21 11.53,15.75 11.53,14.9 11.22,14.59 11.22,14.53 10.96,14.27 J1.19
N$31
  Top 0.152: R1_EP_DR.1 R_TYPE_SEL.2 12.97,25.57 SJ1.2
N$33  (via drill 0.35 layers 1-2)
  Top 0.152: L5.1 7.65,8.58 C2-EP-DR.1 6.92,8.65 6.47,9.11 D5.2 5.17,8.38 v5.55,8 | v18.25,23.95 17.72,24.48 Q1.3
  Route2 0.152: v18.25,23.95 18.25,17.9 8.35,8 v5.55,8
N$34
  Top 0.152: C2-EP-DR.2 7.24,6.66 D4.2 6.95,5.61 D2.1
P0.13/1.5D
  Top 0.152: 9.76,4.03 SW_UP.2 | 9.76,4.03 C30.2 | R5.1 9.76,4.35 9.76,4.03
P0.14/1.5D
  Top 0.152: SW_ENT.2 C31.2 20.79,4.38 R8.1
P1.01/1.6C
  Top 0.152: DMG2305UX-7.1 R_PWR_EPD.1
P1.02/1.6D
  Top 0.152: SW_DN.2 31.77,4.03 C29.2 31.76,4.35 R7.1
P1.09  (via drill 0.35)
  Top 0.152: U1.P$R1 30,18.25 29.85,18.25 v28.61,17.01 | U1.P$L24 37.28,19.11 38.02,19.11 v38.31,18.82
  Bottom 0.152: v38.31,18.82 38.15,18.82 35.75,16.42 29.2,16.42 v28.61,17.01
PMIC_INT  (via drill 0.35)
  Top 0.152: U1.P$T2 30.18,18.05 29.68,17.55 v29.68,17.2 | IC1.A1 23.65,14.88 24.3,14.88 v24.33,14.86
  Bottom 0.152: v29.68,17.2 29.15,17.74 28.48,17.74 25.63,14.89 24.33,14.89 v24.33,14.86
PREGVH  (via drill 0.35)
  Top 0.152: v9.66,13.3 10.61,13.3 J1.21 11.57,13.27 EPD_C9.2
  Top 0.305: D5.1 v1.67,7.96 v1.66,7.95
  Bottom 0.305: v1.66,7.95 4.56,7.95 5.97,9.36 7.52,9.36 8.86,10.7 8.86,12.7 9.46,13.3 v9.66,13.3
PREVGL  (via drill 0.35)
  Top 0.152: EPD_C11.2 11.32,12.27 J1.23 10.62,12.29 v9.67,12.29
  Top 0.305: D2.2 4.2,2.11 v3.68,2.63
  Bottom 0.152: v3.68,2.63 9.74,8.69 9.74,12.21 v9.67,12.29
RESE
  Top 0.152: J1.3 10.76,22.39 11.11,22.39 12.12,23.4 12.12,24.21 12.17,24.27 12.17,24.45 | 12.17,24.45 R1_EP_DR.2 | 12.17,24.45 12.3,24.45 12.5,24.65 15.03,24.65 Q1.2
RESET  (via drill 0.35)
  Top 0.152: J2.6 31.27,10.25 33.8,10.25 v34.05,10.5 34.05,10.05 34.2,9.9 38.37,9.9 TP_RESET.TP | U1.P$AC13 33.8,15.55 33.8,14.7 33.95,14.55 v33.97,14.55
  Bottom 0.152: v34.05,10.5 34.05,14.45 33.97,14.53 v33.97,14.55
RF
  Top 0.152: ANT1.1 41.19,19.97 C22.1 C4.1 L1.2
SCL/1.4C  (via drill 0.35)
  Top 0.152: IC4.C1 28.48,3.4 v29.57,3.4 | U3.7 37,6.3 37,6.62 36.84,6.77 32.22,6.77 30.73,5.28 v28.72,5.28
  Route15 0.152: v29.57,3.4 29.57,4.44 v28.72,5.28 | v28.72,5.28
SCL/2.4C  (via drill 0.35)
  Top 0.152: v23.09,17.54 23.33,17.29 IC3.12 23.33,16.41 23.48,16.27 23.48,15.27 23.1,14.89 IC1.B1 | 24.68,19.97 24.38,19.67 22.7,19.67 R17.2 | U1.P$M2 29.75,19.1 26.33,19.1 25.46,19.97 24.68,19.97 | v20.96,10.04 20.64,10.04 20.36,10.32 R4.1 20,12.38 TP_SCL.TP | v24.68,20.01 24.68,19.97
  Bottom 0.152: v20.96,10.04 21.26,10.34 21.26,12.68 24.05,15.46 24.84,15.46 25.35,15.98 25.35,17.05 24.81,17.59 24.31,17.59 24.26,17.54 v23.09,17.54 22.52,18.1 22.52,19.28 23.21,19.97 24.64,19.97 v24.68,20.01
SDA/1.4C  (via drill 0.35)
  Top 0.152: IC4.B2 27.96,2.38 28.7,2.35 29.15,1.89 29.15,1.75 29.35,1.55 v30.13,1.55 | U3.8 35.73,5.26 v31.61,5.26
  Route15 0.152: v30.13,1.55 30.43,1.85 30.43,4.08 v31.61,5.26
SDA/2.4C  (via drill 0.35)
  Top 0.152: IC3.2 24.14,17.25 24.41,16.98 v24.56,16.98 | U1.P$L1 30.15,19.75 29.96,19.75 v29.75,19.95 | IC1.C1 22.7,15.75 22.87,15.92 v22.87,16.01 | R2.1 19.03,10.32 v18.65,10.7 18.48,10.7 TP_SDA.TP | R18.2 29.5,19.95 v29.75,19.95 | v29.75,19.95
  Bottom 0.152: 22.89,15.95 22.96,15.89 23.47,15.89 v24.56,16.98 | 22.89,15.95 22.87,15.95 22.22,16.6 22.22,19.42 23.42,20.62 29.09,20.62 v29.75,19.95 | 22.89,15.95 22.89,14.95 v18.65,10.7 | 22.89,15.95 22.89,15.98 v22.87,16.01
SWDCLK  (via drill 0.35)
  Top 0.152: J2.4 28.4,11.85 28.4,15.5 v28.45,15.55 | U1.P$AA24 37.27,16.81 37.93,17.47 v38.62,17.47 42.67,13.41 TP_SWDCLK.TP
  Route15 0.152: v28.45,15.55 v28.45,15.56 36.02,15.56 37.93,17.47 v38.62,17.47
SWDIO  (via drill 0.35)
  Top 0.152: J2.2 27.73,11.25 24.85,11.25 24.44,10.84 v24.44,10.64 | U1.P$AC24 37.26,16.48 38.35,16.48 38.38,16.5 v38.4,16.48 | v38.4,16.48 38.93,15.95 38.93,14.63 TP_SWDIO.TP | v38.4,16.48 v38.4,16.47
  Route15 0.152: v24.44,10.64 v24.45,10.65 24.45,13.81 25.81,15.17 27.8,15.17 28.12,14.85 28.66,14.85 28.98,15.17 36.52,15.17 37.82,16.47 v38.4,16.47
SWO  (via drill 0.35 layers 1-2)
  Top 0.152: U1.P$AD22 36.09,15.33 v36.29,15.13 | TP_SWO.TP 38.36,13.37 37.84,13.9 v37.06,13.9
  Route2 0.152: v36.29,15.13 37.04,14.38 37.04,13.92 v37.06,13.9
VBAT/1.2A
  Top 0.305: U3.2 U3.3 37.59,4.15 C27.2 38.45,2.48 TP_VBAT.TP
VBAT/2.5C
  Top 0.152: IC1.C2 22.7,14 22.4,13.7
  Top 0.305: C37.2 21.59,13.7 22.4,13.7
VBUS/1.5D
  Top 0.305: J4.A4_B9 C43.1 C42.1 25.39,24.12 23.71,22.44 22.85,22.44 22.62,22.67 22.62,23.05 D3.5 22.33,22.96 21.81,22.44 20.95,22.44 19.7,23.69 19.7,26.7 20.65,27.65 20.65,28.84 J4.A9_B4
VBUS/2.6D
  Top 0.152: IC1.A2 23.85,13.98
  Top 0.305: 23.85,13.98 C38.2 | C38.2 23.85,12.63 C21.1 | C38.2 23.97,13.05 23.97,13.44 25.78,15.24 27.18,15.24 28.17,16.24 28.73,16.24 29.73,15.24 30.52,15.24 U1.P$AD2
VREG
  Top 0.152: 23.1,13.8 IC1.B2 | 21.35,9.18 IC2.A1 IC2.A2 IC2.A3 C24.2 C23.2 23.44,8.04 TP_VREG.TP
  Top 0.305: 23.1,13.8 23.25,13.65 23.25,13.25 23.04,13.04 C39.1 22.41,12.44 21.64,11.68 21.64,9.47 21.35,9.18
(copper drawn outside any net)
  shapes: Top area x1